# Allegro board PLL_VCO_FINAL.brd
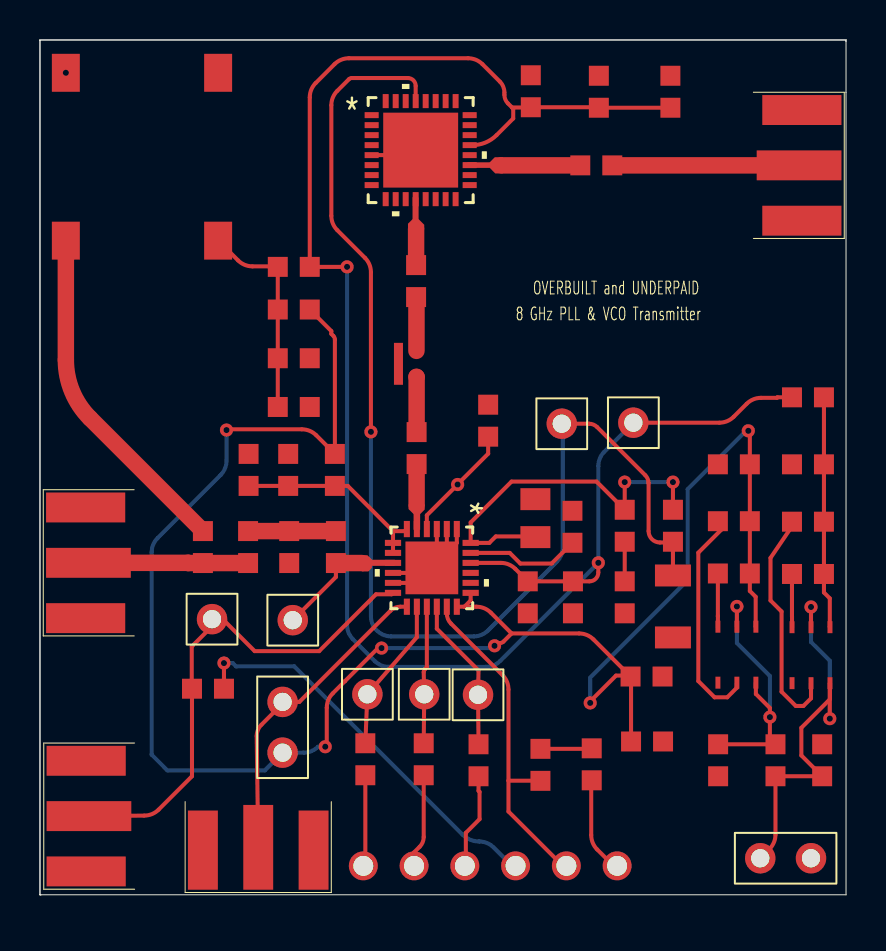
[diagram p0: board, top side]
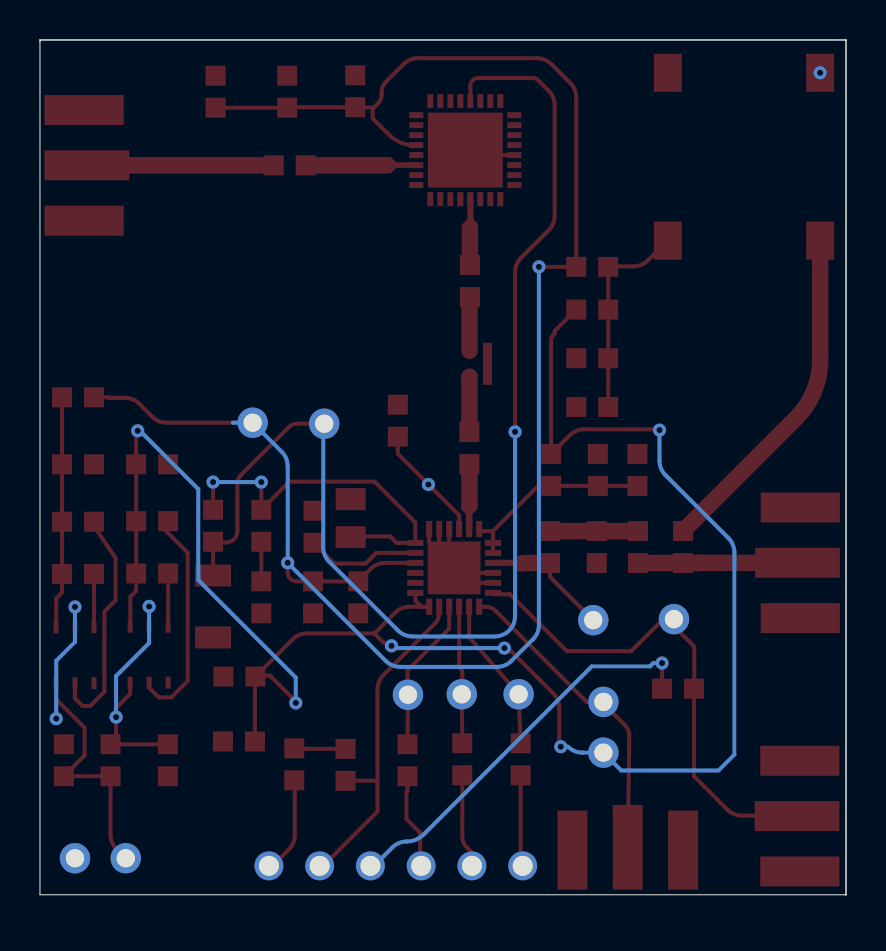
[diagram p1: board, bottom side, seen from below]

Outline 40.34 x 42.77 mm; copper layers: TOP, BOTTOM. Coordinates in mm from the lower left corner of the outline.
Outline path: 0,42.77 0,42.75 ; 0,42.77 40.34,42.77 ; 0,42.77 0,42.75 ; 0,42.77 40.34,42.77 ; 0,42.75 0,0 ; 0,42.75 0,0 ; 40.34,42.77 40.34,42.7 ; 40.34,42.77 40.34,42.7 ; 0,0 0.03,0 ; 0,0 0.03,0 ; 0.03,0 0.05,0 ; 0.03,0 0.05,0 ; 0.05,0 40.34,0 40.34,42.7

## Placement (name value [footprint] x y rotation side)
C1  100pF  [CAPC1608N]  18.85 22.35 90 top
C2  0.1uF  [CAPC1608N]  12.42 21.26 270 top
C3  22uF  [CAPC1608N]  24.56 40.21 90 top
C4  100pF  [CAPC1608N]  22.43 23.72 90 top
C5  10pF  [CAPC1608N]  10.44 21.26 270 top
C6  1nF  [CAPC1608N]  27.97 40.18 90 top
C7  1nF  [CAPC1608N]  10.41 17.4 90 top
C8  1nF  [CAPC1608N]  14.81 17.4 270 top
C9  50.8nF  [CAPC3216N]  31.67 14.43 90 top
C10  11nF  [CAPC2012N]  24.79 18.85 270 top
C11  100pF  [CAPC1608N]  31.55 40.18 90 top
C12  1.51uF  [CAPC1608N]  29.26 14.88 90 top
C13  10nF  [CAPC1608N]  12.7 24.41 180 top
C14  10nF  [CAPC1608N]  12.7 26.85 180 top
C15  0.1uF  [CAPC1608N]  26.67 14.88 270 top
C16  100pF  [CAPC1608N]  27.84 36.5 0 top
C17  10 pF  [CAPC1608N]  24.41 14.88 270 top
C18  CAP  [CAPC1608N]  30.35 10.92 0 top
C19  100pF  [CAPC1608N]  18.82 30.71 270 top
C20  CAP  [CAPC1608N]  30.38 7.67 0 top
C21  10nF  [CAPC1608N]  34.72 18.69 0 top
C22  4.7uF  [CAPC1608N]  34.72 21.54 0 top
C23  1uF  [CAPC1608N]  33.93 6.73 90 top
C24  10nF  [CAPC1608N]  38.43 18.67 0 top
C25  4.7uF  [CAPC1608N]  38.43 21.54 0 top
C26  1uF  [CAPC1608N]  39.14 6.73 270 top
J1  CON3  [SMA_AMPHENOL_S]  4.55 16.61 180 top
J2  CON3  [SMA_AMPHENOL_S]  35.86 36.5 0 top
J3  CON3  [SMA_AMPHENOL_S]  4.57 3.94 180 top
J4  HEADER 6  [JUMPER6]  22.53 1.45 0 top
J5  JUMPER1  [JUMPER2]  12.14 9.65 270 top
J8  CON3  [SMA_AMPHENOL_S]  10.92 4.5 270 top
J9  HEADER 2  [JUMPER2]  36.04 1.83 0 top
R1  0  [CAPC1608N]  14.76 21.26 90 top
R2  60.1  [CAPC1608N]  31.67 18.47 270 top
R3  29.4  [CAPC1608N]  29.26 18.47 90 top
R4  0  [CAPC1608N]  8.15 17.4 270 top
R5  51  [CAPC1608N]  12.47 17.4 90 top
R6  4.7K  [CAPC1608N]  26.64 18.41 90 top
R7  0  [CAPC1608N]  12.7 29.29 180 top
R8  0  [CAPC1608N]  12.7 31.42 180 top
R9  0  [CAPC1608N]  8.41 10.31 180 top
R10  330  [CAPC1608N]  16.28 6.78 90 top
R11  330  [CAPC1608N]  19.2 6.78 90 top
R12  330  [CAPC1608N]  21.95 6.73 90 top
R13  0  [CAPC1608N]  25.04 6.5 270 top
R14  10k  [CAPC1608N]  27.61 6.53 90 top
R15  0  [CAPC1608N]  36.8 6.73 90 top
R16  330  [CAPC1608N]  34.72 16.08 0 top
R17  0  [CAPC1608N]  38.43 24.89 180 top
R18  330  [CAPC1608N]  38.43 16.05 0 top
TP1  TEST POINT  [JUMPER1]  26.11 23.57 0 top
TP2  TEST POINT  [JUMPER1]  12.65 13.74 0 top
TP3  TEST POINT  [JUMPER1]  8.61 13.79 0 top
TP4  TEST POINT  [JUMPER1]  16.38 10.03 0 top
TP5  TEST POINT  [JUMPER1]  19.23 10.03 0 top
TP6  TEST POINT  [JUMPER1]  21.92 10.01 0 top
TP9  TEST POINT  [JUMPER1]  29.69 23.62 0 top
U1  PAT129  [PAT2012]  18.34 26.57 270 top
U2  ADF4158  [CP_24_7]  19.61 16.36 270 top
U3  ADP3300  [SMP6_1_9R2_8]  34.87 12.01 0 top
U4  ADP3300  [SMP6_1_9R2_8]  38.58 11.99 0 top
VCO1  hmc509  [HCP_32_1]  19.05 37.26 0 top
Y1  Fox801  [FOX801]  5.11 36.93 90 top

## Library data of the parts
C1-C26 = CAP
J1-J3 J8 = CON3
J4 = HEADER 6
J5 = JUMPER1: User Part Number: ***
J9 = HEADER 2: User Part Number: ***
R1-R18 = RES
TP1-TP6 TP9 = TEST POINT: User Part Number: ***
U1 = PAT129
U2 = ADF4158
U3 U4 = ADP3300
VCO1 = hmc509
Y1 = Fox801

## Footprints (pads in the part's own frame, mm; a bottom-side part is the same pattern mirrored in y, then rotated)
CAPC1608N
  rect 1x1 smd: 1(-0.8,0) 2(0.8,0)
CAPC2012N
  rect 1.1x1.5 smd: 1(-0.95,0) 2(0.95,0)
CAPC3216N
  rect 1.1x1.8 smd: 1(-1.55,0) 2(1.55,0)
CP_24_7
  rect 0.813x0.305 smd: 1(-1.943,1.25) 2(-1.943,0.75) 3(-1.943,0.25) 4(-1.943,-0.25) 5(-1.943,-0.75) 6(-1.943,-1.25) 13(1.943,-1.25) 14(1.943,-0.75) 15(1.943,-0.25) 16(1.943,0.25) 17(1.943,0.75) 18(1.943,1.25)
  rect 0.305x0.813 smd: 7(-1.25,-1.943) 8(-0.75,-1.943) 9(-0.25,-1.943) 10(0.25,-1.943) 11(0.75,-1.943) 12(1.25,-1.943) 19(1.25,1.943) 20(0.75,1.943) 21(0.25,1.943) 22(-0.25,1.943) 23(-0.75,1.943) 24(-1.25,1.943)
  rect 2.642x2.642 smd: 25(0,0)
FOX801
  rect 1.9x1.4 smd: 1(4.2,-3.81) 2(4.2,3.81) 3(-4.2,3.81) 4(-4.2,-3.81)
HCP_32_1
  rect 0.705x0.3 smd: 1(-2.452,1.75) 2(-2.452,1.25) 3(-2.452,0.75) 4(-2.452,0.25) 5(-2.452,-0.25) 6(-2.452,-0.75) 7(-2.452,-1.25) 8(-2.452,-1.75) 17(2.452,-1.75) 18(2.452,-1.25) 19(2.452,-0.75) 20(2.452,-0.25) 21(2.452,0.25) 22(2.452,0.75) 23(2.452,1.25) 24(2.452,1.75)
  rect 0.3x0.705 smd: 9(-1.75,-2.452) 10(-1.25,-2.452) 11(-0.75,-2.452) 12(-0.25,-2.452) 13(0.25,-2.452) 14(0.75,-2.452) 15(1.25,-2.452) 16(1.75,-2.452) 25(1.75,2.452) 26(1.25,2.452) 27(0.75,2.452) 28(0.25,2.452) 29(-0.25,2.452) 30(-0.75,2.452) 31(-1.25,2.452) 32(-1.75,2.452)
  rect 3.75x3.75 smd: 33(0,0)
JUMPER1
  round 1.524 hole 0.914: 1(0,0)
JUMPER2
  round 1.524 hole 0.914: 1(0,0) 2(2.54,0)
JUMPER6
  round 1.45 hole 1: 1(-6.35,0) 2(-3.81,0) 3(-1.27,0) 4(1.27,0) 5(3.81,0) 6(6.35,0)
PAT2012
  rect 0.65x0.25 smd: 1(-0.65,0.5) 2(0.65,0.5)
  rect 2.1x0.45 smd: 3(0,-0.4)
SMA_AMPHENOL_S
  rect 3.962x1.499 smd: 1(2.261,2.769) 3(2.261,-2.769)
  rect 4.242x1.499 smd: 2(2.121,0)
SMP6_1_9R2_8
  rect 0.25x0.6 smd: 1(-0.95,-1.4) 2(0,-1.4) 3(0.95,-1.4) 4(0.95,1.4) 5(0,1.4) 6(-0.95,1.4)

## Nets
+3V: C18.1(A) C20.1(A) C21.2(B) C22.2(B) J5.2 R1.2(B) R7.1(A) R16.2(B) U2.18(SDVDD) U2.19(DVDD) U3.4(OUT)
+5V: C3.1(A) C6.1(A) C11.1(A) C15.1(A) C17.1(A) R8.1(A) R17.2(B) TP9.1 U2.22(VP) VCO1.21(VCC)
+12V: C26.2(B) J9.1 R15.1(A) U4.3(SD) U4.5(IN)
GND: C2.1(A) C3.2(B) C4.2(B) C5.1(A) C6.2(B) C9.1(A) C10.1(A) C11.2(B) C12.1(A) C13.1(A) C14.1(A) C15.2(B) C17.2(B) C18.2(B) C20.2(B) C22.1(A) C23.1(A) C25.1(A) C26.1(A) J1.1 J1.3 J2.1 J2.3 J3.1 J3.3 J8.1 J8.3 J9.2 R5.1(A) R6.2(B) U1.3(GND) U2.1(CPGND) U2.2(AGND1) U2.3(AGND2) U2.10(DGND) U2.11(SDGND) U2.25(GND) U3.1(GND) U4.1(GND) VCO1.5(GND5) VCO1.33(GND33) Y1.2(GND)
VDD: J4.6 R14.1(A)
CLK: J4.1 R10.1(A)
DATA: J4.2 R11.1(A)
LE: J4.3 R12.1(A)
MUXOUT: J4.5 R13.2(B) U2.17(MUXOUT)
RF_OUT: C16.2(B) J2.2
TXDATA: J4.4 R9.1(A)
N26468: C24.1(A) U4.2(NR)
N26532: C10.2(B) R2.1(A) R3.2(B) U2.24(CP)
N26536: C24.2(B) C25.2(B) R17.1(A) R18.2(B) U4.4(OUT)
N26556: R18.1(A) U4.6(ERR)
N27202: C9.2(B) R2.2(B) TP1.1 VCO1.29(VTUNE)
N27376: C19.2(B) U1.1(IN)
N27432: C1.1(A) U2.5(RFINA)
N27440: C1.2(B) U1.2(OUT)
N27536: C4.1(A) U2.4(RFINB)
N27608: R13.1(A) R14.2(B)
N27786: R6.1(A) U2.23(RSET)
N27912: R12.2(B) TP6.1 U2.16(LE)
N27924: R11.2(B) TP5.1 U2.15(DATA)
N27936: R10.2(B) TP4.1 U2.14(CLK)
N28072: J3.2 R9.2(B) TP3.1 U2.12(TXDATA)
N28132: C8.2(B) TP2.1 U2.9(REFIN)
N28158: C7.2(B) C8.1(A) R5.2(B)
N28170: C7.1(A) J1.2 R4.2(B)
N28198: R4.1(A) Y1.3(OUT)
N28210: C13.2(B) C14.2(B) R7.2(B) R8.2(B) Y1.4(VDD)
N28334: J5.1 J8.2 U2.13(CE)
N28420: C2.2(B) C5.2(B) R1.1(A) U2.6(AVDD) U2.7(AVDD1) U2.8(AVDD2)
N28710: C19.1(A) VCO1.12(RFOUT/2)
N28718: C16.1(A) VCO1.19(RFOUT)
N28824: C23.2(B) R15.2(B) U3.3(SD) U3.5(IN)
N28882: C21.1(A) U3.2(NR)
N28906: R16.1(A) U3.6(ERR)
N265881: C12.2(B) R3.1(A)

Pads without a net: U2 20 21; VCO1 1 2 3 4 6 7 8 9 10 11 13 14 15 16 17 18 20 22 23 24 25 26 27 28 30 31 32; Y1 1

## Via types
v1: diameter 0.66, hole 0.305, TOP to BOTTOM, 18 vias

## Routing (per net, layer and track width the routed paths; a pad name or vN(x,y) marks a point on that pad's centre or on a via; arc(x,y) is an arc through that point)
+3V: length 97.6
  TOP w0.203: 21.24,14.41 U2.18 ; 21.24,14.41 21.84,14.41 arc(22.23,14.34) 22.56,14.12 23.6,13.08 ; 21.24,14.41 21.55,14.73 U2.19 ; 29.51,10.97 27.7,12.78 arc(27.37,13) 26.98,13.08 23.6,13.08 ; 29.51,10.97 28.82,10.97 27.53,9.68 v1(27.53,9.6) ; 29.51,10.97 C18.1 ; v1(35.45,23.22) 35.52,23.14 C22.2 C21.2 R16.2 35.52,15.2 35.81,14.91 35.81,13.42 U3.4 ; C18.1 29.58,10.9 C20.1 ; C18.1 29.55,11.11 ; R7.1 14.58,28.21 14.58,28.07 14.68,27.96 arc(14.74,27.88) 14.76,27.78 R1.2 13.82,22.99 arc(13.49,23.21) 13.1,23.29 9.37,23.29 v1(9.33,23.25) ; 23.6,13.08 23.19,12.67 arc(23.11,12.62) 23.02,12.6 22.89,12.6 v1(22.75,12.46) ; v1(17.09,12.34) 16.92,12.34 14.65,10.08 arc(14.43,9.75) 14.35,9.36 14.35,7.49 v1(14.27,7.41)
  BOTTOM w0.203: v1(9.33,23.25) 9.33,21.72 arc(9.26,21.33) 9.04,21 5.89,17.85 arc(5.67,17.52) 5.59,17.13 5.59,7.01 6.38,6.22 11.25,6.22 J5.2 13.19,7.11 arc(13.58,7.19) 13.91,7.41 v1(14.27,7.41) ; v1(17.09,12.34) 22.63,12.34 v1(22.75,12.46) ; v1(27.53,9.6) 27.53,10.87 32.41,15.75 32.41,20.29 35.33,23.22 v1(35.45,23.22)
+5V: length 92.1
  TOP w0.203: TP9.1 34,23.62 arc(34.39,23.7) 34.71,23.92 35.36,24.57 arc(35.69,24.79) 36.08,24.87 36.88,24.87 36.9,24.89 R17.2 ; U2.22 23.07,16.61 arc(23.45,16.53) 23.78,16.31 C17.1 C15.1 27.5,15.68 arc(27.81,15.81) 27.94,16.13 v1(27.94,16.61) ; 23.62,39.4 23.68,39.34 23.68,38.85 22.85,38.01 arc(22.29,37.64) 21.64,37.51 VCO1.21 ; 23.62,39.4 24.55,39.4 C3.1 27.94,39.41 C6.1 C11.1 ; 23.62,39.4 23.42,39.6 arc(23.29,39.8) 23.24,40.03 23.24,40.14 arc(23.18,40.44) 23.01,40.69 22.14,41.56 arc(21.81,41.78) 21.42,41.86 15.46,41.86 arc(15.07,41.78) 14.74,41.56 13.8,40.62 arc(13.58,40.29) 13.5,39.9 R8.1 v1(15.37,31.42)
  BOTTOM w0.203: 30.68,23.62 TP9.1 28.24,22.17 arc(28.02,21.84) 27.94,21.45 v1(27.94,16.61) 23.03,11.7 arc(22.7,11.48) 22.31,11.4 17.46,11.4 arc(17.08,11.48) 16.75,11.7 15.66,12.78 arc(15.44,13.11) 15.37,13.5 v1(15.37,31.42)
+12V: length 21.2
  TOP w0.203: v1(39.52,8.81) 39.52,10.58 U4.3 39.53,9.79 38.1,8.36 38.1,6.97 C26.2 R15.1 36.8,3.01 arc(36.73,2.62) 36.51,2.29 J9.1 ; U4.5 v1(38.58,14.4)
  BOTTOM w0.203: v1(39.52,8.81) 39.52,11.71 38.58,12.65 v1(38.58,14.4)
GND: length 11.9
  TOP w0.203: VCO1.5 18.8,37.01 VCO1.33 ; U2.11 18.86,15.61 19.36,16.11 ; 19.86,16.61 U2.25 19.36,16.11 ; 19.86,16.61 U2.3 ; 19.86,16.61 20.36,17.11 ; 19.36,16.11 U2.10 17.65,16.11 17.63,16.13 ; U2.1 20.86,17.61 20.36,17.11 ; 20.36,17.11 U2.2
  vias: v1(1.3,41.13)
VDD: length 4.9
  TOP w0.203: J4.6 28.7,1.45 27.88,2.27 arc(27.66,2.6) 27.58,2.99 27.58,5.7 R14.1
CLK: length 4.6
  TOP w0.203: R10.1 16.28,1.55 J4.1
DATA: length 4.7
  TOP w0.203: R11.1 19.2,2.89 arc(19.15,2.63) 19,2.4 18.72,2.12 J4.2
LE: length 4.8
  TOP w0.203: J4.3 21.31,1.5 21.31,3.1 22,3.78 22,5.15 21.95,5.2 R12.1
MUXOUT: length 17.1
  TOP w0.203: 23.44,5.71 25.04,5.71 R13.2 ; 23.44,5.71 23.44,4.17 26.16,1.45 J4.5 ; 23.44,5.71 23.44,10.27 arc(23.37,10.66) 23.15,10.99 20.57,13.57 arc(20.41,13.8) 20.36,14.08 U2.17
RF_OUT: length 9.3
  TOP w0.823: C16.2 J2.2
TXDATA: length 20
  TOP w0.203: R9.1 v1(9.21,11.6)
  BOTTOM w0.203: J4.4 23.62,1.45 22.7,2.37 arc(22.37,2.59) 21.98,2.67 21.98,2.67 arc(21.53,2.76) 21.14,3.02 12.73,11.43 9.81,11.43 9.64,11.6 v1(9.21,11.6)
N26468: length 11.8
  TOP w0.203: U4.2 38.58,9.83 38.2,9.45 37.82,9.45 37.11,10.16 37.11,14.17 36.56,14.73 36.56,16.85 37.69,18.52 arc(37.67,18.6) C24.1
N26532: length 18.7
  TOP w0.203: C10.2 24.75,17.93 22.81,17.93 22.48,17.61 U2.24 21.55,18.63 23.6,20.68 27.85,20.68 R3.2 v1(29.26,20.65) ; R2.1 v1(31.67,20.65)
  BOTTOM w0.203: v1(29.26,20.65) v1(31.67,20.65)
N26536: length 11.6
  TOP w0.203: R17.1 C25.2 C24.2 R18.2 39.23,15.13 39.52,14.83 39.52,13.4 U4.4
N26556: length 2.7
  TOP w0.203: U4.6 37.63,13.92 37.63,13.92 R18.1
N27202: length 62
  TOP w0.203: VCO1.29 18.8,40.48 arc(18.69,40.75) 18.41,40.87 15.6,40.87 arc(15.53,40.85) 15.46,40.81 14.88,40.23 arc(14.66,39.9) 14.58,39.51 14.58,33.97 arc(14.66,33.59) 14.88,33.26 16.26,31.87 arc(16.48,31.54) 16.56,31.15 v1(16.56,23.16) ; C9.2 R2.2 31.64,17.63 31.02,17.63 arc(30.62,17.79) 30.45,18.2 30.45,20.59 arc(30.41,20.81) 30.29,21 27.88,23.4 arc(27.69,23.53) 27.47,23.57 TP1.1
  BOTTOM w0.203: TP1.1 26.16,23.52 26.16,17.39 arc(26.08,17) 25.86,16.67 22.42,13.23 arc(22.09,13.01) 21.7,12.93 17.58,12.93 arc(16.86,13.23) 16.56,13.94 v1(16.56,23.16)
N27376: length 2.7
  TOP w0.823: U1.1 18.84,29.89 C19.2
N27432: length 2
  TOP w0.203: C1.1 18.86,21.54
  TOP w0.823: 18.85,19.53 C1.1
N27440: length 2.8
  TOP w0.823: C1.2 18.85,25.91 U1.2
N27536: length 5.9
  TOP w0.203: U2.4 19.36,18.99 v1(20.9,20.53) 20.9,20.54 22.43,22.07 C4.1
N27608: length 2.6
  TOP w0.203: R13.1 27.58,7.3 R14.2
N27786: length 5.7
  TOP w0.203: U2.23 23.51,17.11 24.04,16.57 25.6,16.57 R6.1
N27912: length 7.7
  TOP w0.203: U2.16 19.86,13.31 21.95,11.23 TP6.1 R12.2
N27924: length 6.9
  TOP w0.203: U2.15 19.36,11.38 19.27,11.29 arc(19.22,11.22) 19.2,11.14 TP5.1 R11.2
N27936: length 7.8
  TOP w0.203: R10.2 TP4.1 18.86,12.89 U2.14
N28072: length 25.1
  TOP w0.203: J3.2 5.22,3.96 arc(5.61,4.04) 5.94,4.26 7.61,5.93 R9.2 7.59,10.33 7.59,12.42 8.61,13.44 TP3.1 9.14,13.79 10.74,12.19 13.97,12.19 16.81,15.04 17.59,15.04 U2.12
N28132: length 5.1
  TOP w0.203: TP2.1 14.81,15.9 C8.2
  TOP w0.823: C8.2 16.12,16.6
N28158: length 4.4
  TOP w0.823: C8.1 R5.2 C7.2
N28170: length 8
  TOP w0.823: C7.1 R4.2 7.42,16.6 7.41,16.61 J1.2
N28198: length 17.2
  TOP w0.823: R4.1 2.5,23.85 arc(1.61,25.19) 1.3,26.76 Y1.3
N28210: length 10.5
  TOP w0.203: C13.2 C14.2 R7.2 R8.2 11.87,31.45 10.63,31.45 arc(10.24,31.52) 9.91,31.74 8.92,32.73 Y1.4
N28334: length 15.9
  TOP w0.203: J8.2 10.85,7.94 arc(10.91,8.25) 11.08,8.51 12.08,9.51 arc(12.13,9.57) J5.1 12.98,9.65 17.54,14.21 arc(17.76,14.36) 18.03,14.41 U2.13
N28420: length 10
  TOP w0.203: 17.67,18.2 15.4,20.46 R1.1 C2.2 C5.2 ; 17.67,18.2 18.25,18.2 U2.6 ; 17.67,18.2 U2.7 U2.8
N28710: length 1.8
  TOP w0.823: C19.1 18.82,33.3
N28718: length 4
  TOP w0.203: C16.1 27.03,36.51
  TOP w0.823: 23.09,36.5 C16.1
N28824: length 13.6
  TOP w0.203: U3.3 35.82,10.05 36.53,9.35 v1(36.53,8.89) 36.53,7.81 R15.2 C23.2 ; U3.5 v1(34.87,14.43)
  BOTTOM w0.203: v1(36.53,8.89) 36.53,10.95 34.87,12.6 v1(34.87,14.43)
N28882: length 11.3
  TOP w0.203: U3.2 34.87,10.36 34.39,9.88 33.76,9.88 32.94,10.69 32.94,17.12 34.08,18.25 arc(34.14,18.4) 34.08,18.54 C21.1
N28906: length 2.7
  TOP w0.203: R16.1 33.92,13.95 33.92,13.94 U3.6
N265881: length 2
  TOP w0.203: R3.1 C12.2

Small or netless copper shapes (teardrops, artwork), in the pictures only: 8 on TOP

## Text on the board
Ref Des/Silkscreen Top: 8 GHz PLL & VCO Transmitter | OVERBUILT and UNDERPAID
